# Altium PCB UPS_PLUS.PcbDoc
Units mil, origin at the board's own origin, x right, y up, seen from the top; angles counter-clockwise.
Board outline 3436.46 x 2204.73 mil, 2 copper layers (Top Layer, Bottom Layer); 12 components, 62 nets, 90 pads, 1 vias.
Unrouted connection lines stored in the file: 94.
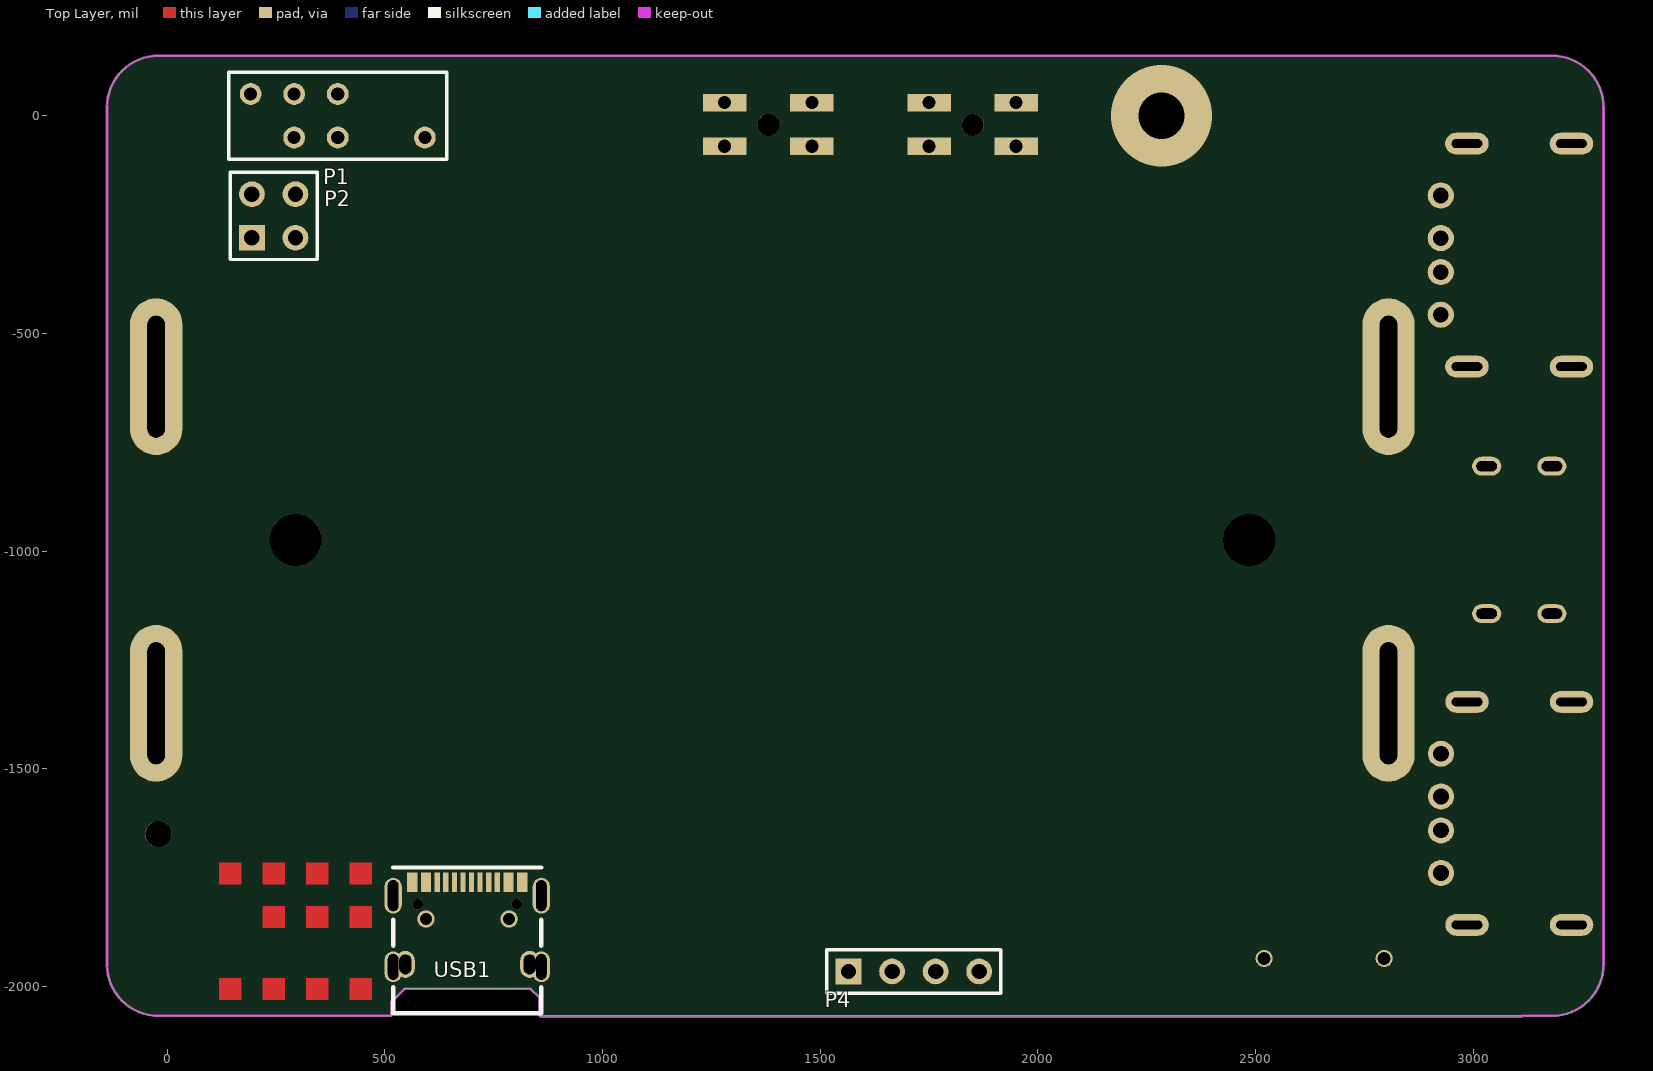
[diagram p0: Top Layer view]
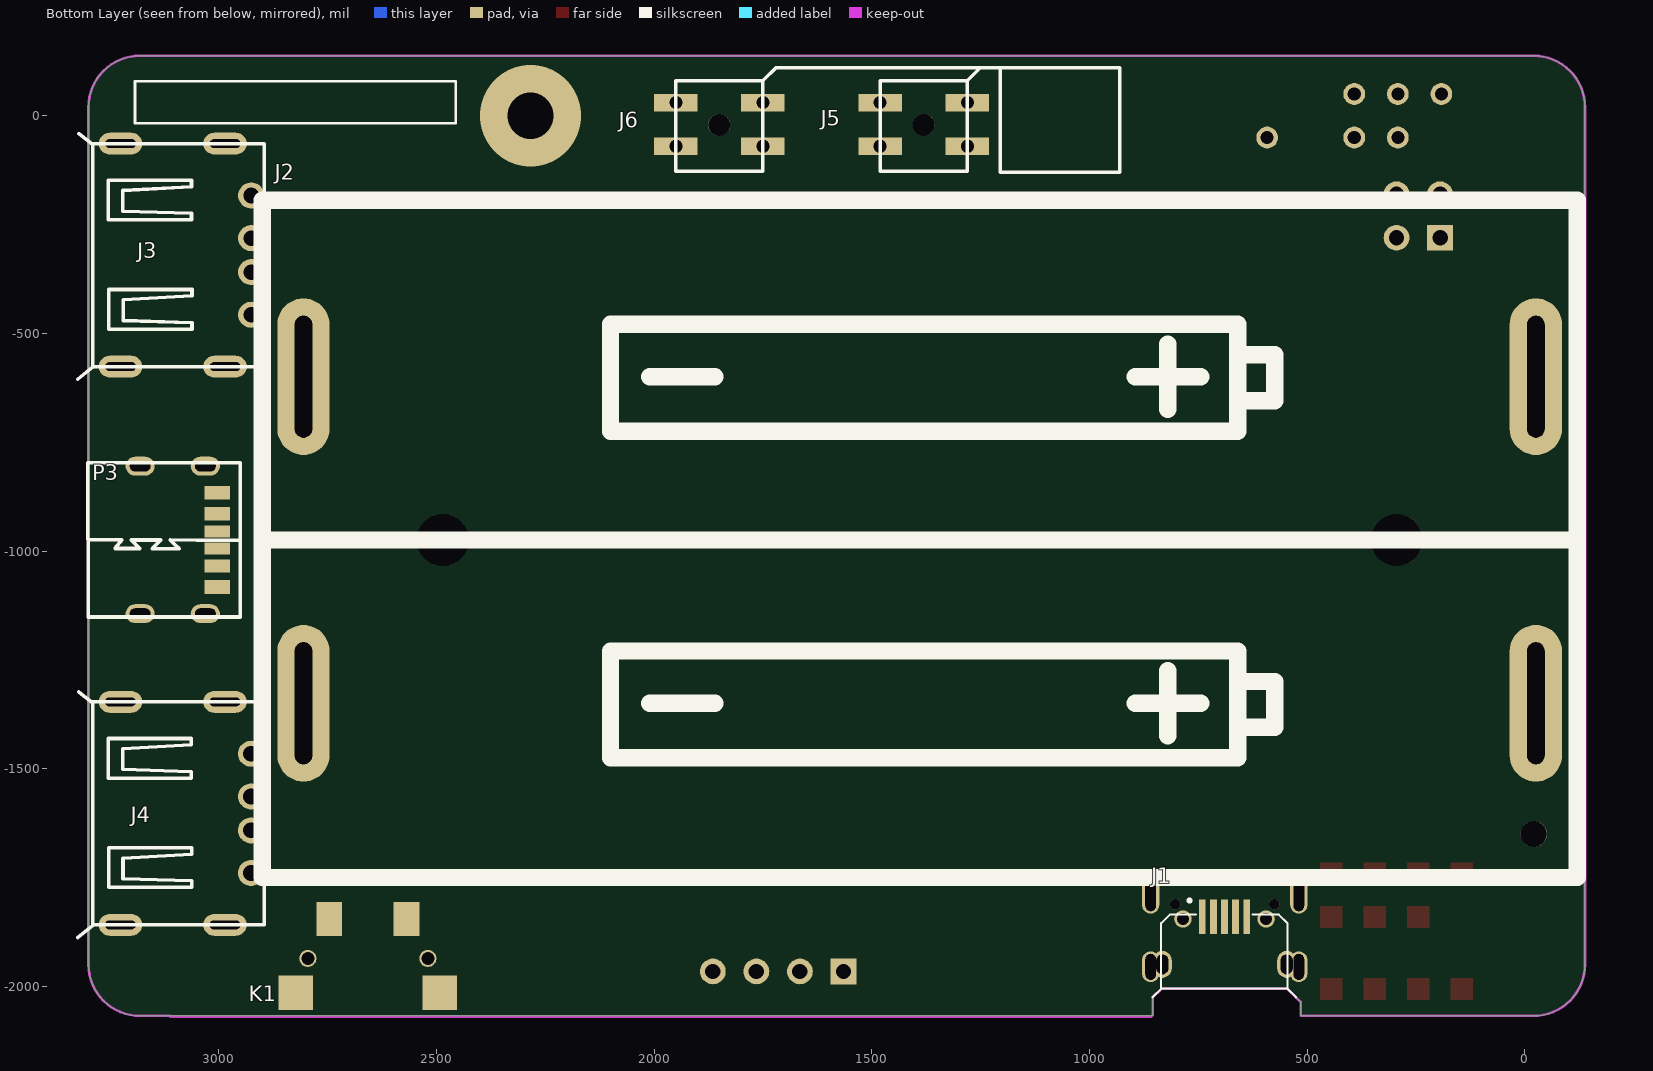
[diagram p1: Bottom Layer view, seen from below]

## Layer stack, top to bottom
Top Solder: solder mask 0.4, Solder Resist, Dk 3.5
Top Layer: signal copper 1.4
Dielectric 1: dielectric 12.6, FR-4, Dk 4.8
Bottom Layer: signal copper 1.4
Bottom Solder: solder mask 0.4, Solder Resist, Dk 3.5

## Board outline
-19.68,-2066.93 515,-2066.93 515,-2035 545,-2005 835,-2005 855,-2025 855,-2065 856.93,-2066.93 3180.55,-2066.93 ccw(c3180.55,-1948.82) 3298.66,-1948.82 3298.66,19.69 3298.67,19.69 ccw(c3180.55,19.69) 3180.55,137.8 -19.68,137.8 -19.69,137.8 ccw(c-19.69,19.69) -137.8,19.69 -137.8,-1948.82 ccw(c-19.69,-1948.82)

## Design rules (kind name [scope] priority, off if disabled: settings)
Clearance [All] p1: gap=6 ignorepadtopadclearanceinfootprint=FALSE
ComponentClearance [All] p1: gap=0 collisioncheckmode=3 verticalgap=0 showdistances=FALSE
PolygonConnect [All] p1: connectstyle=Direct reliefconductorwidth=10 reliefentries=4 polygonreliefangle="90 Angle" airgapwidth=10
RoutingVias [All] p1: holewidth=11.81 width=17.72 viastyle="Through Hole" minholewidth=11.81 minwidth=13.78 maxholewidth=28 maxwidth=500
SolderMaskExpansion [All] p1: expansion=4 istentingtop=FALSE
Width [All] p1: maxlimit=120 minlimit=6 preferedwidth=10
29 further rules are at their usual default settings.

## Classes and differential pairs
component class Connecter: J3 J4 J5 J6 K1 P1 P3 P4
component class Charge: J1 J2 USB1

## Components (designator, comment, footprint, x,y, rotation, side; value= is the part's Value field where it differs from the comment)
J1 "USB_micro_SMT" USB_Micro_SMT 690,-1894.16 r270 bottom locked value=USB_micro_5P
J2 "Header 2X2" 18650电池座[特别修改4P] -230,-599.13 r0 bottom locked
J3 "USB_A" USBA-10mm 2925,-320 r270 bottom
J4 "USB_A" USBA-10mm 2925.29,-1602 r270 bottom locked
J5 "Header 2X2" HDR2X2SMD 1380,-20 r270 bottom
J6 "Header 2X2" HDR2X2SMD 1849.37,-20 r270 bottom
K1 "Button" 直插贴片一体化按键[TB-GND] 2795,-1935 r180 bottom
P1 "Header 4" 6P顶针 192,50.02 r0 top locked
P2 "Header 4" HDR2x2 195,-280 r0 top
P3 "USBC" USBC 3180,-804.62 r270 bottom
P4 "Header 4" HDR1X4 1564.87,-1965 r0 top
USB1 "TYPE-C16PIN" USB-C-SMD_TYPE-C16PIN 689.41,-1861.3 r0 top locked

## Footprints (in the part's own frame and the unit in brackets; to place one, negate y for a bottom-side part, rotate by r counter-clockwise, add the part's x,y. Pads: shape width x height; smd on the part's side, far side on the other; paste and mask are expansions set on the pad)
6P顶针 [mil] "Connector; Header; 5 Position"
  round 50 hole 30: 1(0,0) 1(100,0) 2(200,0) 2(400,-100) 3(100,-100) 4(200,-100)
  silkscreen extent -50,-150 450,50
18650电池座[特别修改4P] [mil]
  round 60 hole 60 unplated: 0(210,1050)
  round 118.11 hole 120 unplated: 0(525,375) 0(2715,375)
  oval 120x360 hole 40 slot 280 at 90 deg: 1(205,750) 2(3035,750) 3(205,0) 4(3035,0)
  silkscreen extent 110,-405 3130,1150
HDR1X4 [mm] "Connector; Header; 4 Position"
  rect 1.5x1.5 hole 0.9: 1(0,0)
  round 1.5 hole 0.9: 2(2.54,0) 3(5.08,0) 4(7.62,0)
  silkscreen extent -1.27,-1.27 8.89,1.27
HDR2x2 [mm] "Connector; Header; 2x2 Position"
  rect 1.5x1.5 hole 0.9: 1(0,0)
  round 1.5 hole 0.9: 2(0,2.54) 3(2.54,0) 4(2.54,2.54)
  silkscreen extent -1.27,-1.27 3.81,3.81
HDR2X2SMD [mil]
  rect 40x100 hole 30: 1(-50,-100.63) 2(-50,99.37) 3(50,-100.63) 4(50,99.37)
  silkscreen extent -100,-101 107,99
USB-C-SMD_TYPE-C16PIN [mm]
  oval 1x2.099 hole 0.61 slot 1.8 at 90 deg: 1(-4.32,1.787) 2(4.32,1.787)
  oval 1x1.799 hole 0.61 slot 1.5 at 90 deg: 3(-4.32,-2.363) 4(4.32,-2.363)
  rect 0.6x1.15 smd: A1B12(-3.2,2.562) A4B9(-2.4,2.562) B1A12(3.2,2.562) B4A9(2.4,2.562)
  rect 0.3x1.15 smd: A5(-1.25,2.562) A6(-0.25,2.562) A7(0.25,2.562) A8(-1.75,2.562) B5(1.75,2.562) B6(0.75,2.562) B7(-0.75,2.562) B8(1.25,2.562)
  round 0.61 hole 0.61 unplated: ""(-2.89,1.288) ""(2.89,1.288)
  silkscreen extent -4.32,-5.08 4.32,3.43
USB_Micro_SMT [mm] "MicroUSB,4脚插固定"
  round 1.016 hole 0.7: 0(-1.262,-2.425) 0(-1.262,2.425)
  oval 1.575x1.1 hole 0.7 slot 1.143 at 0 deg: 0(1.388,-3.625) 0(1.388,3.625)
  rect 2x0.4 smd: 1(-1.387,-1.3) 2(-1.387,-0.65) 3(-1.387,0) 4(-1.387,0.65) 5(-1.387,1.3)
  silkscreen extent -2.36,-4.2 3.31,4.18
USBA-10mm [mil]
  oval 50x100 hole 70 slot 20 at 0 deg: 0(-256,-300) 0(-256,-60) 0(256,-300) 0(256,-60)
  round 60 hole 36: 1(-137,0) 2(-39,0) 3(39,0) 4(137,0)
  silkscreen extent -279,-398 285,30
USBC [mm]
  oval 1.1x1.7 hole 0.6 slot 1.2 at 90 deg: 0(0,0) 0(0,3.8) 0(8.6,0) 0(8.6,3.8)
  rect 0.7x1.5 smd: A5(3.8,4.5) B5(4.8,4.5)
  rect 0.76x1.5 smd: A9(5.825,4.5) B9(2.775,4.5)
  rect 0.8x1.5 smd: A12(7.05,4.5) B12(1.55,4.5)
  silkscreen extent -0.2,-3.06 8.8,5.84, body extent -0.15,-3.13 8.78,4.89, height 3.26
直插贴片一体化按键[TB-GND] [mm]
  rect 2x2 smd: 1(-0.7,-2) 2(7.7,-2)
  rect 1.5x2 smd: 1(1.25,2.3) 2(5.75,2.3)
  round 1 hole 0.762: 3(0,0) 3(7,0)

## Part data
J1: "microUSB-B,5P/F,7.6×9×4,SMD,RoHS", ComponentLink1Description=ErpDataInfo, ComponentLink1URL=http://erp.zlgmcu.com/ErpExt/ErpData/ListMateriel.aspx?pkey=1.10.05.0024, RoHS=RoHS, Text Field1=100, Text Field2=80, 名称=USB插座, 型号=MiniUSB-B,5P/F,7.6×9×4,SMD, 物料代码=1.10.05.0024, 贴片和直插=SMT
J2 J5 J6: "Header, 2-Pin, Dual row", LatestRevisionDate=17-Jul-2002, LatestRevisionNote="Re-released for DXP Platform.", Publisher="Altium Limited"
J3 J4: "USB-A", ComponentLink1Description=ErpDataInfo, ComponentLink1URL=http://erp.zlgmcu.com/ErpExt/ErpData/ListMateriel.aspx?pkey=1.10.05.0024, RoHS=RoHS, Text Field1=100, Text Field2=80, 名称=USB插座, 型号=MiniUSB-B,5P/F,7.6×9×4,SMD, 物料代码=1.10.05.0024, 贴片和直插=SMT
K1: library part KEY-3
P1 P2 P4: "Header, 4-Pin", LatestRevisionDate=17-Jul-2002, LatestRevisionNote="Re-released for DXP Platform.", Publisher="Altium Limited"
P3: library part USBC_charge
USB1: BOM_Manufacturer="SHOU HAN", BOM_Manufacturer Part=TYPE-C16PIN, BOM_Supplier=LCSC, BOM_Supplier Part=C393939, Contributor=LCSC, spicePre=U, spiceSymbolName=TYPE-C16PIN

## Free pads (board coordinates)
  round 50 hole 50: 1(1381,-21.16) 1(1850.37,-21.16)

## Via types
v1: diameter 232, hole 106.3, Top Layer to Bottom Layer, 1 vias

## Nets (pads, with @x,y where several pads share a name; then routed paths per layer and width w, separated by ;. In a path a pad name is that pad's centre, name@x,y a point inside that pad or via, vN(x,y) a via of type N, cw(c..) or ccw(c..) an arc to the next point about the centre after c; other vN are vias at no path point)
+5.2V: J3.1 J4.1 P3.A9 P3.B9
CC1: USB1.A5
CC2: USB1.B5
DMB: J1.2
DMC: USB1.A7 USB1.B7
DPB: J1.3
DPC: USB1.A6 USB1.B6
GND: J1.0 J1.5 J2.2 J2.4 J3.0 J3.4 J4.0 J4.4 J6.1 J6.2 J6.3 J6.4 P1.2 P2.2 P3.0 P3.A12 P3.B12 P4.4 USB1.1 USB1.2 USB1.3 USB1.4 USB1.A1B12 USB1.B1A12
IP_EN: 
KEY: K1.1@2745.79,-1844.45
MCU_3V: P4.1
MT_EN: 
NetC3_1: 
NetC3_2: 
NetC4_2: 
NetC5_1: 
NetC8_1: 
NetC9_1: 
NetC10_2: 
NetC25_1: 
NetC25_2: 
NetC29_2: 
NetC32_2: 
NetK1_2: K1.2@2568.62,-1844.45
NetLED1_1: 
NetLED1_2: 
NetLED3_1: 
NetLED5_1: 
NetP3_A5: P3.A5
NetP3_B5: P3.B5
NetR1_1: 
NetR3_1: 
NetR4_1: 
NetR7_2: 
NetR10_2: 
NetR12_1: 
NetR13_1: 
NetR15_1: 
NetR18_1: 
NetR19_1: 
NetR20_1: 
NetR23_2: 
NetR30_1: 
NetR31_1: 
NetU7_1: 
NetU7_2: 
OTA_UPDATE: 
PI_IN: 
PI_VCC: P1.1 P2.1
PWR_EN: 
SCL: P1.4 P2.4
SDA: P1.3 P2.3
SWCLK: P4.2
SWDIO: P4.3
USBIN: J1.1
VBAT: J5.1 J5.2 J5.3 J5.4
VBAT+: J2.1 J2.3
VBUS: USB1.A4B9 USB1.B4A9
VBUSG: 
VING: 
VMID: 
VSYS: 
pads on no net: J1.4 J2.0 J3.2 J3.3 J4.2 J4.3 K1.1@2822.56,-2013.74 K1.2@2491.85,-2013.74 K1.3 USB1. USB1.A8 USB1.B8
copper on no net:
  other v1: 2283.46,0

## Keep-outs
Keep-Out Layer:
  lines w6: -19.68,137.8 3180.55,137.8 cw(c3180.55,19.69) 3298.67,19.69 3298.66,-1948.82 cw(c3180.55,-1948.82) 3180.55,-2066.93 3112.04,-2066.93 3110.7,-2068.28 858.28,-2068.28 855,-2065 855,-2025 835,-2005 545,-2005 515,-2035 515,-2066.93 -19.68,-2066.93 cw(c-19.69,-1948.82) -137.8,-1948.82 -137.8,19.69 cw(c-19.69,19.69) -19.69,137.8

## Other copper
Top Layer:
  region net GND: 420,-1980 470,-1980 470,-2030 420,-2030
  region net GND: 420,-1715 470,-1715 470,-1765 420,-1765
  region net GND: 370,-1715 370,-1765 320,-1765 320,-1715
  region net GND: 270,-1715 270,-1765 220,-1765 220,-1715
  region net GND: 170,-1715 170,-1765 120,-1765 120,-1715
  region net GND: 320,-1815 370,-1815 370,-1865 320,-1865
  region net GND: 420,-1815 470,-1815 470,-1865 420,-1865
  region net GND: 220,-1815 270,-1815 270,-1865 220,-1865
  region net GND: 320,-1980 370,-1980 370,-2030 320,-2030
  region net GND: 220,-1980 270,-1980 270,-2030 220,-2030
  region net GND: 120,-1980 170,-1980 170,-2030 120,-2030

## Silkscreen, mask and mechanical layers (free items; w line width, h text height)
Top Overlay:
  pour cut-out: 3191.8,78.98 2455.66,78.98 2455.66,-17 3191.8,-17
Bottom Overlay:
  lines w6: 2455.66,-17 3191.8,-17 3191.8,78.98 2455.66,78.98 2455.66,-17
  lines w8: 1205,110 1205,-130 930,-130 930,110 1250.63,110 ; 1280.63,80 1250.63,110 ; 1750,80 1720,110 1250.63,110
Top Paste:
  region: 420,-1980 470,-1980 470,-2030 420,-2030
  region: 120,-1980 170,-1980 170,-2030 120,-2030
  region: 320,-1980 370,-1980 370,-2030 320,-2030
  region: 220,-1980 270,-1980 270,-2030 220,-2030
  region: 220,-1815 270,-1815 270,-1865 220,-1865
  region: 320,-1815 370,-1815 370,-1865 320,-1865
  region: 420,-1815 470,-1815 470,-1865 420,-1865
  region: 420,-1715 470,-1715 470,-1765 420,-1765
  region: 370,-1715 370,-1765 320,-1765 320,-1715
  region: 270,-1715 270,-1765 220,-1765 220,-1715
  region: 170,-1715 170,-1765 120,-1765 120,-1715
Top Solder:
  region: 420,-1980 470,-1980 470,-2030 420,-2030
  region: 420,-1715 470,-1715 470,-1765 420,-1765
  region: 420,-1815 470,-1815 470,-1865 420,-1865
  region: 270,-1715 270,-1765 220,-1765 220,-1715
  region: 170,-1715 170,-1765 120,-1765 120,-1715
  region: 220,-1815 270,-1815 270,-1865 220,-1865
  region: 220,-1980 270,-1980 270,-2030 220,-2030
  region: 120,-1980 170,-1980 170,-2030 120,-2030
  region: 370,-1715 370,-1765 320,-1765 320,-1715
  region: 320,-1815 370,-1815 370,-1865 320,-1865
  region: 320,-1980 370,-1980 370,-2030 320,-2030